# EAGLE board BigMuff2 (EAGLE 7.1.0)

Size 122.86 x 71.75 mm. Coordinates in mm from the lower left corner, seen from the top.
Outline: 0,0 122.86,0 122.86,71.75 0,71.75 0,0
Copper layers (1*16): Top 0.035mm / dielectric 1.5mm / Bottom 0.035mm
Design rules "default": minimum track width 10mil, minimum drill 24mil, track to track 8mil, track to pad 8mil, pad to pad 8mil, via to via 8mil, smd to smd 8mil, copper to edge 40mil, drill to drill 8mil, minimum pad ring 10mil, minimum via ring 8mil, stop-mask expansion 4mil, vias tented up to drill 0mil, thermal gap 10mil

## Footprints (pad centres in the part's own frame; a part is rotated, then mirrored left to right if it is on the bottom)
C2.5-3 = drill 0.813 pad 1.6 octagon: 1 -1.27,0; 2 1.27,0
D-2.5 = drill 0.813 octagon: A 1.27,0; C -1.27,0
1X03 = drill 1.016 long: 1 -2.54,0; 2 0,0; 3 2.54,0
TO220AV = drill 1.016 long: B -2.54,-2.54; C 0,-2.54; E 2.54,-2.54
0204V = drill 0.813 octagon: 1 -1.27,0; 2 1.27,0
PG203J = drill 1.499 octagon: 1 -5.004,-0.203; 4 5.74,-4.369; 5 -1.753,-4.902 | drill 1.499: 2 2.845,4.902; 3 1.448,2.388

## Placement (x,y rotation side)
C1  [C2.5-3]  16.51,23.49 0 top
C2  [C2.5-3]  29.21,32.38 90 top
C3  [C2.5-3]  33.02,20.95 180 top
C4  [C2.5-3]  43.18,10.79 0 top
C5  [C2.5-3]  45.72,37.46 0 top
C6  [C2.5-3]  54.61,32.38 0 top
C7  [C2.5-3]  55.88,20.95 0 top
C8  [C2.5-3]  71.12,36.2 0 top
C9  [C2.5-3]  64.77,40 0 top
C10  [C2.5-3]  81.28,22.23 0 top
C11  [C2.5-3]  86.36,13.33 0 top
C12  [C2.5-3]  91.44,20.95 0 top
C13  [C2.5-3]  83.82,43.81 90 top
C14  [C2.5-3]  97.79,50.16 0 top
C15  [C2.5-3]  88.9,51.43 0 top
C16  [C2.5-3]  21.59,61.59 0 top
D1  [D-2.5]  69.85,50.16 180 top
D2  [D-2.5]  69.85,45.09 0 top
D3  [D-2.5]  53.34,37.46 180 top
D4  [D-2.5]  53.34,41.27 0 top
JP1  [1X03]  34.29,12.06 90 top
JP2  [1X03]  80.01,12.06 90 top
JP3  [1X03]  95.25,56.51 0 top
JP4  [1X03]  20.32,66.68 0 top
Q1  TIP41C  [TO220AV]  22.86,-0.64 180 top
Q2  TIP41C  [TO220AV]  45.72,-0.64 180 top
Q3  TIP41C  [TO220AV]  67.31,-0.64 180 top
Q4  TIP41C  [TO220AV]  88.9,-0.64 180 top
R1  [0204V]  10.16,23.49 0 top
R2  [0204V]  11.43,13.33 90 top
R3  [0204V]  16.51,13.33 90 top
R4  [0204V]  24.13,31.11 90 top
R5  [0204V]  26.67,40 90 top
R6  [0204V]  33.02,3.17 90 top
R7  [0204V]  52.07,10.79 0 top
R8  [0204V]  53.34,4.44 90 top
R9  [0204V]  57.15,4.44 90 top
R10  [0204V]  48.26,29.84 0 top
R11  [0204V]  53.34,48.89 90 top
R12  [0204V]  64.77,20.95 0 top
R13  [0204V]  68.58,9.53 90 top
R14  [0204V]  72.39,9.53 90 top
R15  [0204V]  69.85,31.11 0 top
R16  [0204V]  69.85,57.79 0 top
R17  [0204V]  86.36,28.57 0 top
R18  [0204V]  93.98,9.53 0 top
R19  [0204V]  102.87,9.53 90 top
R20  [0204V]  99.06,9.53 90 top
R21  [0204V]  101.6,42.54 90 top
R22  [0204V]  95.25,42.54 90 top
X1  PG203J  [PG203J]  99.06,65.41 180 top
X2  PG203J  [PG203J]  15.24,48.89 0 top

## Library data of the parts
C1-C16 = capacitor-wima
D1-D4 = diode
JP1-JP4 = pinhead
Q1-Q4 = transistor-power
R1-R22 = resistor
X1 X2 = con-hirschmann; OC_FARNELL: unknown; OC_NEWARK: unknown

## Nets
GND: C13.2 C16.1 JP3.1 JP4.1 JP4.2 R2.1 R3.1 R6.1 R8.1 R9.1 R13.1 R14.1 R18.1 R19.1 R20.1 X1.1 X2.1
N$1: C2.2 C3.1 Q1.C R4.2 R5.1
N$2: C1.2 C2.1 Q1.B R2.2 R4.1
N$3: C1.1 R1.2
N$5: Q1.E R3.2
N$6: C3.2 JP1.3
N$7: JP1.1 R6.2
N$8: C14.1 Q4.C R21.1
N$9: C4.1 JP1.2
N$10: C6.2 C7.1 D1.C D2.A Q2.C R10.2 R11.1
N$11: C5.2 D1.A D2.C
N$12: C5.1 C6.1 Q2.B R7.2 R8.2 R10.1
N$13: Q2.E R9.2
N$14: C7.2 R12.1
N$15: C4.2 R7.1
N$16: C15.2 X1.2 X1.3 X1.4 X1.5
N$17: C8.2 C10.1 D3.C D4.A Q3.C R15.2 R16.1
N$18: C8.1 C9.1 Q3.B R12.2 R13.2 R15.1
N$19: Q3.E R14.2
N$20: C9.2 D3.A D4.C
N$21: C13.1 JP2.3 R17.2
N$23: C10.2 C11.1 R17.1
N$24: C12.1 JP2.2
N$26: C12.2 Q4.B R19.2 R22.1
N$27: C11.2 JP2.1 R18.2
N$28: Q4.E R20.2
N$29: C14.2 JP3.3
N$31: R1.1 X2.2 X2.3 X2.4 X2.5
N$32: C15.1 JP3.2
VCC: C16.2 JP4.3 R5.2 R11.2 R16.2 R21.2 R22.2

## Tracks (layer width: path | path; a pad name or v marks a point on that pad's centre or on a via)
GND  (16 unrouted)
N$1  (4 unrouted)
N$2  (4 unrouted)
N$3  (1 unrouted)
N$5  (1 unrouted)
N$6  (1 unrouted)
N$7  (1 unrouted)
N$8  (2 unrouted)
N$9  (1 unrouted)
N$10  (6 unrouted)
N$11  (2 unrouted)
N$12  (5 unrouted)
N$13  (1 unrouted)
N$14  (1 unrouted)
N$15  (1 unrouted)
N$16  (4 unrouted)
N$17  (6 unrouted)
N$18  (5 unrouted)
N$19  (1 unrouted)
N$20  (2 unrouted)
N$21  (2 unrouted)
N$23  (2 unrouted)
N$24  (1 unrouted)
N$26  (3 unrouted)
N$27  (2 unrouted)
N$28  (1 unrouted)
N$29  (1 unrouted)
N$31  (4 unrouted)
N$32  (1 unrouted)
VCC  (6 unrouted)